# Altium PCB MPU6050.PcbDoc
Units mil, origin at the board's own origin, x right, y up, seen from the top; angles counter-clockwise.
Board outline 770 x 1195 mil, 2 copper layers (Top Layer, Bottom Layer); 15 components, 12 nets, 64 pads, 6 vias.
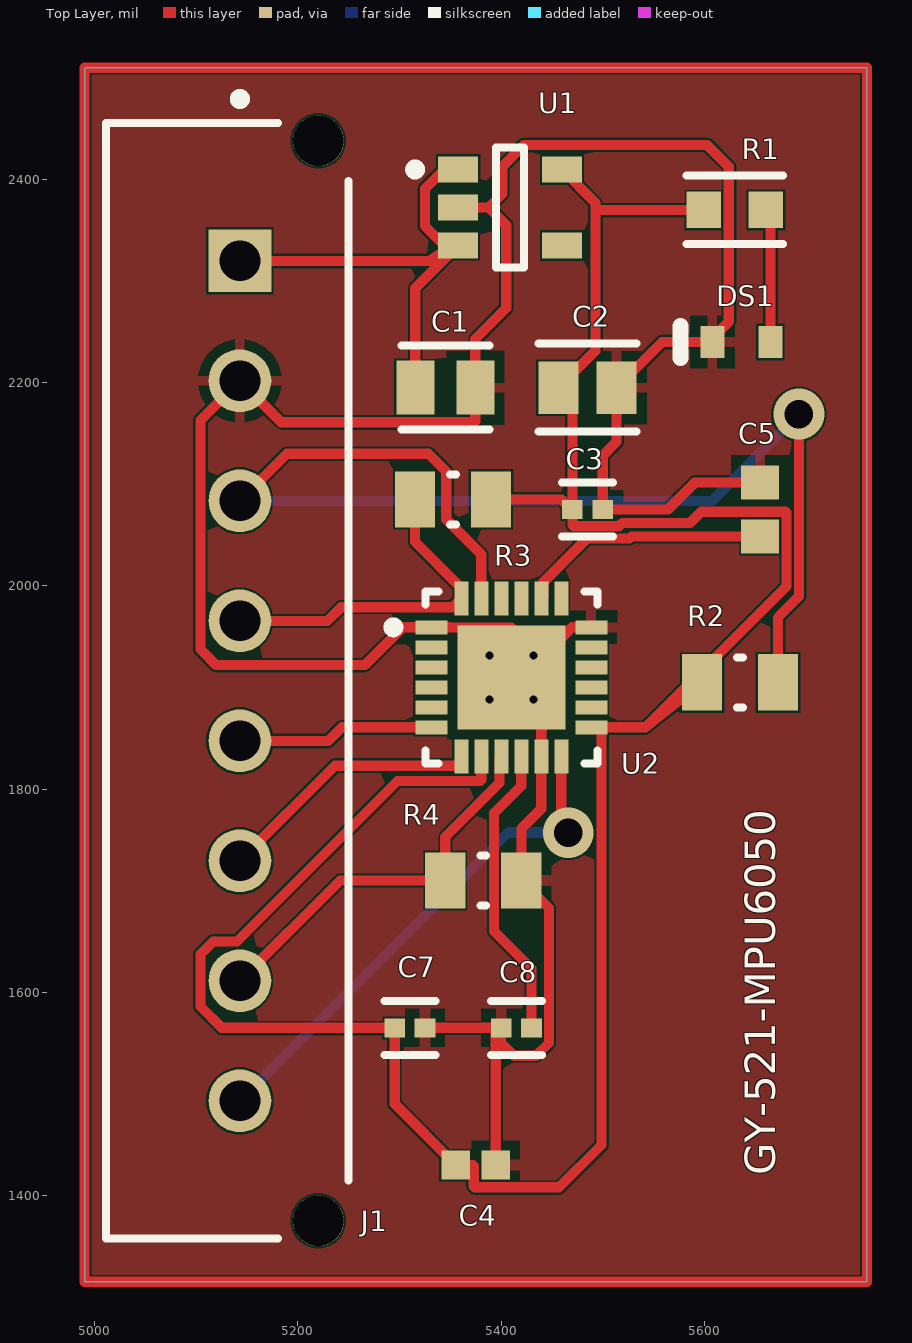
[diagram p0: Top Layer view]
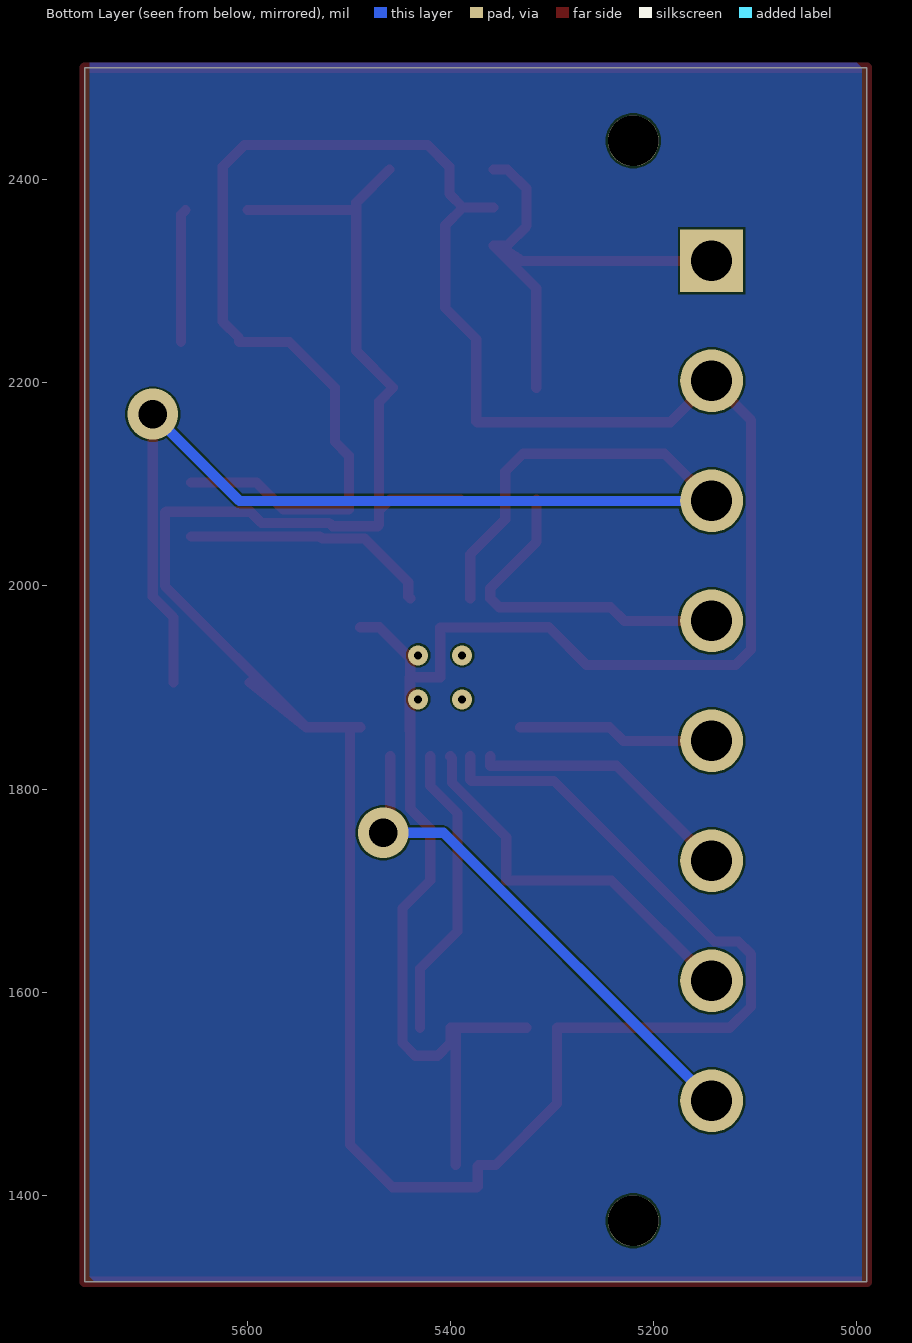
[diagram p1: Bottom Layer view, seen from below]
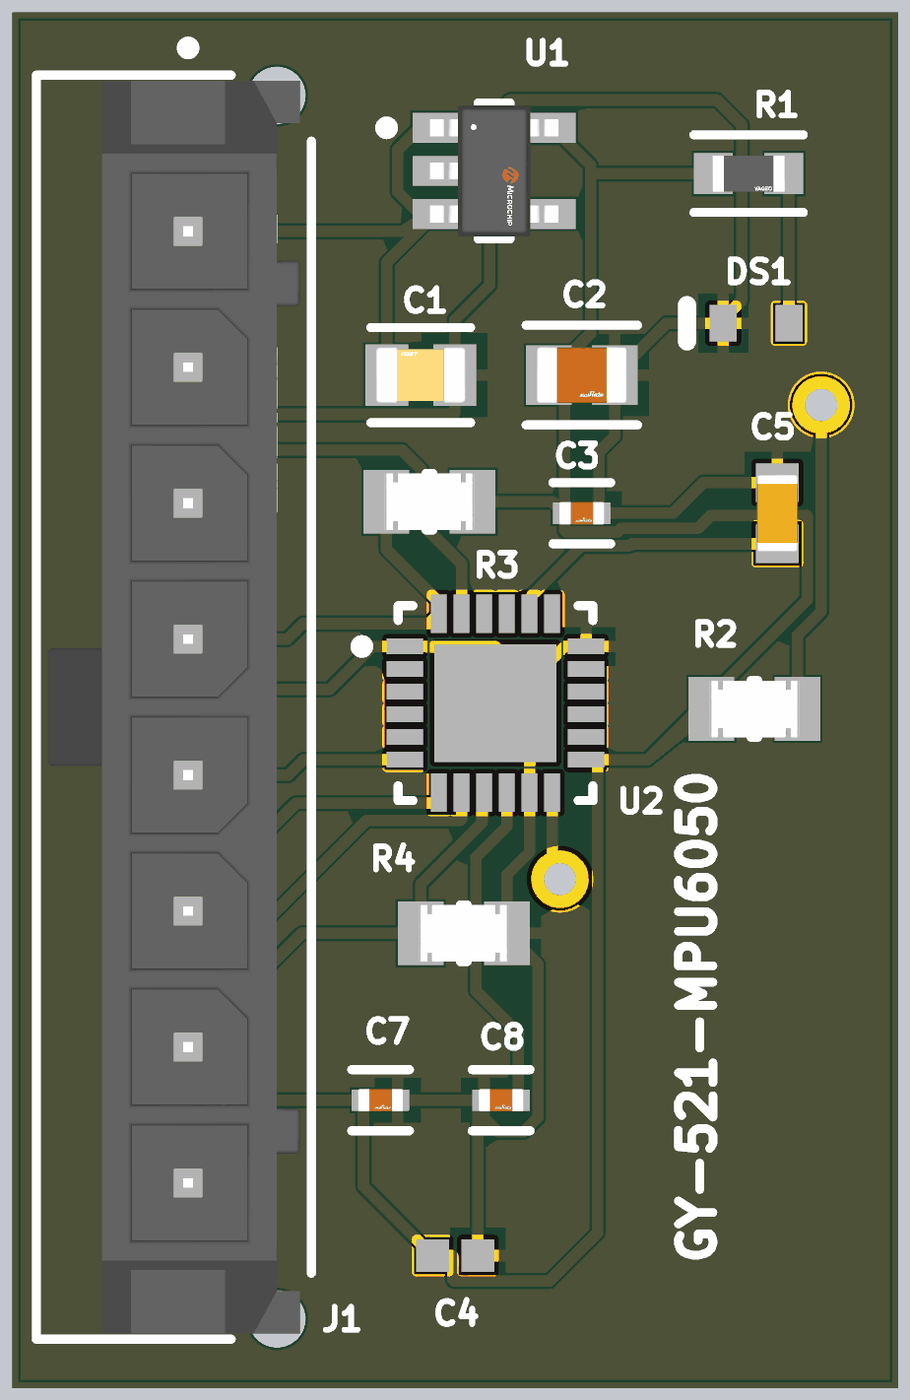
[diagram p2: 3D render of the assembled board from above, using the file's embedded part models]

## Layer stack, top to bottom
Top Solder: solder mask 0.4, Solder Resist, Dk 3.5
Top Layer: signal copper 1.4
Dielectric 1: dielectric 12.6, FR-4, Dk 4.8
Bottom Layer: signal copper 1.4
Bottom Solder: solder mask 0.4, Solder Resist, Dk 3.5

## Board outline
4990,1315 4990,2510 5760,2510 5760,1315

## Design rules (kind name [scope] priority, off if disabled: settings)
Clearance [All] p1: gap=2 ignorepadtopadclearanceinfootprint=TRUE
ComponentClearance [All] p1: gap=5 collisioncheckmode=3 verticalgap=5 showdistances=FALSE
HoleToHoleClearance [All] p1: gap=5 allowstackedmicrovias=TRUE
MinimumSolderMaskSliver [All] p1: minsoldermaskwidth=5
PolygonConnect [All] p1: connectstyle=Relief reliefconductorwidth=10 reliefentries=4 polygonreliefangle="90 Angle" airgapwidth=10
RoutingVias [All] p1: holewidth=28 width=50 viastyle="Through Hole" minholewidth=28 minwidth=50 maxholewidth=28 maxwidth=50
ShortCircuit [All] p1: allowed=TRUE
SilkToSilkClearance [All] p1: silktosilkclearance=5
SilkToSolderMaskClearance [IsPad] p1: minsilkscreentomaskgap=5 clearancetoexposedcopper=TRUE
SolderMaskExpansion [All] p1: expansion=4 istentingtop=FALSE
SupplyNets "Schematic Supply Nets_2" [InNet('GND')] p1: voltage=0.000
SupplyNets "Schematic Supply Nets_1" [InNet('MAX6V')] p2: voltage=0.000
SupplyNets "Schematic Supply Nets" [InNet('+3.3')] p3: voltage=0.000
UnRoutedNet [All] p1: checkbadconnections=TRUE
Width [All] p1: maxlimit=10 minlimit=10 preferedwidth=10
23 further rules are at their usual default settings.

## Components (designator, comment, footprint, x,y, rotation, side; value= is the part's Value field where it differs from the comment)
C1 "4.7" FP-C0805C475K8PACTU-MFG 5345,2195 r0 top
C2 "10" FP-GRM21B-0_15-IPC_C 5485,2195 r0 top
C3 "0.1" FP-GCM155-0_05-IPC_C 5485,2075 r0 top
C4 "10nF" CAPC0402(1005)60_M 5375,1430 r0 top
C5 "2.2nF" CAPC1608X90X35NL10T15 5655,2075 r90 top
C7 "0.1uF" FP-GCM155-0_05-IPC_C 5310.1,1565 r0 top
C8 "0.1uF" FP-GCM155-0_05-IPC_C 5414.9,1565 r0 top
DS1 "red" VISH-TLMX1100_V 5636.46,2240 r180 top
J1 "43650-0815" FP-43650-0815-MFG 5130.43,1906.5 r90 top
R1 "2k" FP-AC0603-IPC_B 5630,2370 r0 top
R2 "4.7k" FP-CRCW0805-e3-IPC_B 5635,1905 r0 top
R3 "4.7k" FP-CRCW0805-e3-IPC_B 5352.57,2085 r180 top
R4 "4.7k" FP-CRCW0805-e3-IPC_B 5382.44,1710 r180 top
U1 "MIC5225-3.3YM5-TR" FP-SOT23-5LD-PL-1-MFG 5408.82,2372.4 r0 top
U2 "MPU-6050" IS-QFN-24_V 5410,1910 r0 top

## Footprints (in the part's own frame and the unit in brackets; to place one, negate y for a bottom-side part, rotate by r counter-clockwise, add the part's x,y. Pads: shape width x height; smd on the part's side, far side on the other; paste and mask are expansions set on the pad)
CAPC0402(1005)60_M [mm] "Chip Capacitor, Body 1.0x0.5mm, Height 0.6mm, IPC Low Density"
  rect 0.72x0.72 smd: 1(-0.5,0) 2(0.5,0)
  body extent -0.55,-0.3 0.55,0.3, height 0.6
CAPC1608X90X35NL10T15 [mm] "Chip Capacitor, 2-Leads, Body 1.7x0.9mm, IPC Medium Density"
  rect 0.85x0.95 smd: 1(-0.675,0) 2(0.675,0)
  body extent -0.85,-0.45 0.85,0.45, height 0.9
FP-43650-0815-MFG [mm]
  rect 1.57x1.57 hole 1.02 paste-2539.97 mask+0: 1(10.5,-0.315)
  round 1.57 hole 1.02 paste-2539.97 mask+0: 2(7.5,-0.315) 3(4.5,-0.315) 4(1.5,-0.315) 5(-1.5,-0.315) 6(-4.5,-0.315) 7(-7.5,-0.315) 8(-10.5,-0.315)
  round 1.27 hole 1.27 unplated paste-2539.97 mask+0: ""(-13.5,-2.275) ""(13.5,-2.275)
  silkscreen extent -13.95,-3.04 14.67,3.04, body extent -14.24,-3.14 14.24,3.14, height 0.25
FP-AC0603-IPC_B [mil]
  rect 33.81x35.91 smd paste+0 mask+0: 1(-30.58,0) 2(30.58,0)
  silkscreen extent -47,-34 47,34, body extent -57,-28 57,28, height 10
FP-C0805C475K8PACTU-MFG [mm]
  rect 0.95x1.35 smd paste+0 mask+0: 1(-0.75,0) 2(0.75,0)
  silkscreen extent -1.1,-1.05 1.1,1.05, body extent -1.4,-0.85 1.4,0.85, height 0.25
FP-CRCW0805-e3-IPC_B [mil]
  rect 39.63x55.44 smd paste+0 mask+0: 1(-37.44,0) 2(37.44,0)
  silkscreen extent -3,-25 3,25, body extent -67,-38 67,38, height 10
FP-GCM155-0_05-IPC_C [mil]
  rect 20.29x18.6 smd paste+0 mask+0: 1(-14.9,0) 2(14.9,0)
  silkscreen extent -25,-27 25,27, body extent -29,-15 29,15, height 10
FP-GRM21B-0_15-IPC_C [mil]
  rect 39.6x51.5 smd paste+0 mask+0: 1(-28.59,0) 2(28.59,0)
  silkscreen extent -48,-43 48,43, body extent -52,-31 52,31, height 10
FP-SOT23-5LD-PL-1-MFG [mm]
  rect 1x0.66 smd paste+0 mask+0: 1(-1.3,0.95) 2(-1.3,0) 3(-1.3,-0.95) 4(1.3,-0.95) 5(1.3,0.95)
  silkscreen extent -2.5,-1.5 0.35,1.5, body extent -1.9,-1.6 1.9,1.6, height 0.25
IS-QFN-24_V [mm] "QFN, 24-Leads, Body 4x4mm, Pitch 0.5mm, Thermal Pad 2.7x2.6mm"
  rect 0.8x0.35 smd: 1(-2,1.25) 2(-2,0.75) 3(-2,0.25) 4(-2,-0.25) 5(-2,-0.75) 6(-2,-1.25) 13(2,-1.25) 14(2,-0.75) 15(2,-0.25) 16(2,0.25) 17(2,0.75) 18(2,1.25)
  rect 0.35x0.85 smd mask+0.102: 7(-1.25,-1.975) 8(-0.75,-1.975) 9(-0.25,-1.975) 10(0.25,-1.975) 11(0.75,-1.975) 12(1.25,-1.975) 19(1.25,1.975) 20(0.75,1.975) 21(0.25,1.975) 22(-0.25,1.975) 23(-0.75,1.975) 24(-1.25,1.975)
  rect 2.7x2.6 smd: 25(0,0)
  silkscreen extent -3.07,-2.15 2.15,2.15, body extent -2,-2 2,2, height 0.95
VISH-TLMX1100_V [mm] "SMD, 2-Leads, Body 1.6x0.8mm"
  rect 0.6x0.8 smd: 1(-0.725,0) 2(0.725,0)
  silkscreen extent 1.53,-0.4 1.53,0.4, body extent -0.8,-0.4 0.8,0.4, height 0.65

## Part data
C1: library part CMP-2007-01007-2, "CAP CER 4.7UF 10V X5R 0805", Capacitance=4.7uF, Case Code (Imperial)=0805, Case Code (Metric)=2012, Dielectric=X5R, Dielectric Material=Ceramic, Max Operating Temperature=85°C, Min Operating Temperature=-55°C, Package Quantity=1, Tolerance=10%, Voltage=10V, Case/Package=0805, Construction=Flat, Depth=1.25mm, Dissipation Factor=5%, Height=1.25mm, Lead Free="Lead Free", Lead Pitch=0.75mm, Length=2mm, Mount="Surface Mount", Number of Pins=2, Packaging="Tape and Reel", Radiation Hardening=No, REACH SVHC="No SVHC", RoHS Compliant=Yes, Series=C, Termination=SMD/SMT, Thickness=0.055inch, Voltage Rating=10V, Voltage Rating (DC)=10V, Width=1.2mm
C2: library part CMP-2007-03541-2, "Chip Multilayer Ceramic Capacitors for General Purpose, 0805, 10uF, X5R, 15%, 10%, 25V", Capacitance=10uF, Case Code (Imperial)=0805, Case Code (Metric)=2012, Dielectric=X5R, Max Operating Temperature=85°C, Min Operating Temperature=-55°C, Package Quantity=1, Tolerance=10%, Voltage=25V, Case/Package=0805, Depth=1.25mm, Height=1.25mm, Lead Free="Lead Free", Length=2mm, Material=Ceramic, Mount="Surface Mount", Packaging="Tape and Reel", Radiation Hardening=No, Termination=SMD/SMT, Thickness=0.053inch, Voltage Rating=25V, Voltage Rating (DC)=25V, Width=0.049inch
C3 C7 C8: library part CMP-2008-03711-3, "Ceramic Capacitor for Automotive 100nF ±10% 16VDC X7R 0402 Paper T/R", Capacitance=100nF, Case Code (Imperial)=0402, Case Code (Metric)=1005, Dielectric=X7R, Max Operating Temperature=125°C, Min Operating Temperature=-55°C, Package Quantity=1, Ratings=AEC-Q200, Tolerance=10%, Voltage=16V, Case/Package=0402, Depth=0.5mm, Height=0.5mm, Lead Free="Lead Free", Length=1mm, Mount="Surface Mount", Packaging="Tape and Reel", Radiation Hardening=No, REACH SVHC="No SVHC", Termination=SMD/SMT, Thickness=0.022inch, Voltage Rating=16V, Voltage Rating (DC)=16V, Width=0.02inch
C4: library part CMP-1034-01878-1, "CAP 10nF 16V -20% to +80% 0402 (1005 Metric) Thickness 0.6mm SMD", Case-EIA=0402, Case-Metric=1005, Rated Voltage="16 V", Tolerance="-20% to +80%", Max Thickness="0.6 mm", Technology=SMT
C5: library part CMP-2006-02908-5, "Chip Capacitor, 2.2 nF, +/- 10%, 50 V, -55 to 125 degC, 0603 (1608 Metric), RoHS, Tape and Reel", Manufacturer=Murata, Max Operating Temperature="125 degC", Min Operating Temperature="-55 degC", Package Quantity=4000, Voltage Rating="50 V", ComponentLink1Description="Manufacturer URL", ComponentLink1URL=http://www.murata.com/, ComponentLink2Description=Datasheet, ComponentLink2URL=http://search.murata.co.jp/Ceramy/image/img/A01X/G101/ENG/GRM188R71H222KA01-01.pdf, DatasheetVersion=02/2016, Height="0.8 mm", Lead Pitch="4 mm", Length="1.6 mm", Mount="Surface Mount", Mounting Technology="Surface Mount", PackageDescription="2-Pin Surface Mount Device, Body 1.6 x 0.8 mm", PackageReference=0603, Packaging="Tape and Reel", Pins=2, REACH SVHC="No SVHC", RoHSCompliant=true
DS1: library part CMP-1666-00027-1, "LED, RED, 2.1 V, -40 to 100 degC, 2-Pin SMD (0603), RoHS, Tape and Reel", Capacitance="12 pF", Case Code (Imperial)=0603, Case Code (Metric)=1608, Max Operating Temperature=125degC, Min Operating Temperature=-55degC, Package Quantity=4000, Resistance="100000000000 Ohm", Tolerance=5%, Type (Capacitors)=C0G, Voltage Rating="50 V", Case/Package=0603, ComponentLink1Description="Manufacturer URL", ComponentLink1URL=http://www.vishay.com/, ComponentLink2Description=Datasheet, ComponentLink2URL=http://www.vishay.com/docs/83173/tlmb1100.pdf, DatasheetVersion="Rev. 2.7, 03/2016", Height="0.8 mm", Length="1.6 mm", Mount="Surface Mount", PackageDescription="2-Pin Surface Mount Device, Body 1.6 x 0.8 mm", PackageReference=TLMX1100, Packaging="Tape and Reel", Pins=2, Radiation Hardening=No, REACH SVHC="No SVHC", RoHSCompliant=True, Voltage Rating (DC)="50 V", Width="0.8 mm"
J1: library part CMP-00257-00277531-1, "43650-0815 Conn Wire to Board HDR 8 POS 3mm Solder ST Top Entry Thru-Hole Micro-Fit 3.0™ Tray", Color=Black, Contact Resistance=30mΩ, Current Rating=5A, Flammability Rating="UL94 V-0", Insulation Resistance=1GΩ, Manufacturer Lifecycle Status=ACTIVE, Max Operating Temperature=105°C, Max Voltage Rating (AC)=250V, Max Voltage Rating (DC)=250.25kV, Min Operating Temperature=-40°C, Voltage Rating=600V, Connector Type="Plug, Socket", Contact Material=Brass, Contact Plating=Tin, Country of Origin=US, Depth=5.57mm, Gender=Male, Glow Wire Compliant=Compliant, Halogen Free="Low Halogen", Housing Color=Black, Housing Material=Thermoplastic, Lead Free="Lead Free", Lead Pitch=3mm, Length=27.65mm, Lifecycle Status=Production, Mount="Through Hole", NexarPartId=277531, Number of Circuits=8, Number of Contacts=8, Number of Ports=1, Number of Positions=8, Number of Rows=1, Number of Terminals=8, Orientation="Vertical, Right Angle", Pitch=3mm, Plating=Tin, Radiation Hardening=No, REACH SVHC=Unknown, RoHS=Compliant, Schedule B=8536694040, Termination="Through Hole", Voltage Rating (DC)=250V
R1: library part CMP-2000-04836-2, "RES 2kΩ 1.00% 0.1W 0603", Case Code (Imperial)=0603, Case Code (Metric)=1608, Max Operating Temperature=155°C, Max Power Dissipation=100mW, Min Operating Temperature=-55°C, Ratings=AEC-Q200, Resistance=2kR, Resistor Type="Thick Film", Temperature Coefficient=100ppm/°C, Tolerance=1%, Voltage Rating=50V, Case/Package=0603, Construction=Rectangular, Depth=0.8mm, Features="Moisture Resistant", Height=0.45mm, Lead Free="Lead Free", Length=1.6mm, Military Standard=Not, Number of Terminations=2, Packaging="Tape and Reel", Power Rating=100mW, Series=AC, Size Code=0603, Termination=SMD/SMT, Width=0.8mm
R2 R3 R4: library part CMP-2100-03615-2, "RES Thick Film, 4.7kΩ, 1%, 0.125W, 100ppm/°C, 0805", Case Code (Imperial)=0805, Case Code (Metric)=2012, Max Operating Temperature=155°C, Max Power Dissipation=125mW, Min Operating Temperature=-55°C, Package Quantity=10, Resistance=4.7kR, Temperature Coefficient=100ppm/°C, Tolerance=1%, Voltage Rating=150V, Case/Package=0805, Composition="Thick Film", Contact Plating=Tin, Depth=1.25mm, Features="Automotive AEC-Q200", Height=0.45mm, Lead Free="Lead Free", Length=2mm, Military Standard=Not, Number of Terminations=2, Packaging="Tape and Reel", Power Rating=125mW, Radiation Hardening=No, Termination=SMD/SMT, Voltage Rating (DC)=150V, Weight=0.000194oz, Width=1.25mm
U1: library part CMP-06324-000013-1, "IC REG LINEAR 3.3V 150MA SOT23-5", Dropout Voltage=310mV, Manufacturer="Microchip Technology", Max Junction Temp=+125°C, Max Supply Voltage=16V, Min Supply Voltage=2.3V, Nominal Supply Current=29-3000uA, Output Current=150mA, Output Voltage=3.3V, Package=SOT23-5LD-PL-1, Temperature="-40°C to +125°C", Temperature Range Low=-40°C, Accuracy Percentage=1%, Automotive=No, Category=IC, ComponentLink2Description=Datasheet, ComponentLink2URL=http://ww1.microchip.com/downloads/en/DeviceDoc/mic5225.pdf, Device Class L1="Integrated Circuits (ICs)", Device Class L2="Power Management ICs", Device Class L3="Voltage Regulators - Linear", Digikey Description="IC REG LINEAR 3.3V 150MA SOT23-5", Height=1.45mm, Lead Free=Yes, Manufacturer Part Number=MIC5225-3.3YM5-TR, Mouser Description="LDO Voltage Regulators High Vin, Low Iq Regulator (Lead Free)", Number of Outputs=1, Octopart=https://octopart.com/mic5225-3.3ym5-tr-microchip-66802280, Output Type=Fixed, RoHS=TRUE, Standoff Height=0mm, Temperature Range High=+125°C
U2: library part CMP-1753-00002-2, "3-Axis Gyroscope, Accelerometer and a Digital Motion Processor(TM) (DMP), 2.375 to 3.46 V, -40 to 85 degC, 24-Pin QFN, RoHS, Tape and Reel", Manufacturer=InvenSense, Standard Package=5,000, Category=Sensors,Transducers, Datasheet URL=http://datasheet.octopart.com/MPU-6050-InvenSense-datasheet-14421344.pdf, Datasheet Version="Rev. 3.3, 05/2012", Dynamic Catalog=MPU-6000™Series, Family=Multifunction, Featured Product=MPU-60506-Axis,IntegratedI²CSolution, Manufacturer URL=http://www.invensense.com/, Online Catalog=MPU-6000™Series, Other Names="1428-1007-2 / MPU6050", Output Type=Digital, Sensor Type=MotionTracking, Unit PriceUSD=Digital

## Via types
v1: diameter 19.68, hole 7.87, Top Layer to Bottom Layer, 4 vias
v2: diameter 50, hole 28, Top Layer to Bottom Layer, 2 vias

## Nets (pads, with @x,y where several pads share a name; then routed paths per layer and width w, separated by ;. In a path a pad name is that pad's centre, name@x,y a point inside that pad or via, vN(x,y) a via of type N, cw(c..) or ccw(c..) an arc to the next point about the centre after c; other vN are vias at no path point)
+3.3: C2.1 C3.1 C4.1 C7.1 R1.1 R2.1 R3.1 U1.5 U2.8 U2.13 | length 2560.5
  Top Layer w10: U2.8 5380.47,1809 5379.47,1808 5298,1808 5140,1650 5116.5,1650 5104,1637.5 5104,1586 5125,1565 C7.1 5295.19,1490.12 C4.1 5372,1430 5373,1429 5373,1409 5374,1408 5457,1408 5498.68,1449.68 U2.13@5498.68,1860.79 ; R3.1 5459.25,2085 5469.25,2075 C3.1 ; U1.5 5492.69,2377.12 5492.69,2370 ; U2.13 U2.13@5498.68,1860.79 ; R2.1 5542,1860.79 ; R1.1 5492.69,2370 ; C3.1 5470.1,2060 5471.4,2058.7 5516,2058.7 5519.3,2062 5586,2062 5597,2073 5680,2073 5681,2072 5681,1999.79 5542,1860.79 ; C3.1 5470.1,2181.31 C2.1 5492.69,2231.28 5492.69,2370 ; U2.13@5498.68,1860.79 5542,1860.79
AD0: J1.7 R4.2 U2.9 | length 388.2
  Top Layer w10: J1.7 5241.61,1710 R4.2 5345,1752.72 5398.27,1805.99 5398.27,1830.35 U2.9
GND: C1.2 C2.2 C3.2 C4.2 C5.2 C7.2 C8.1 DS1.2 J1.2 R4.1 U1.2 U2.1 U2.11 U2.18 U2.25 | length 2864.2
  Top Layer w10: C7.2 C8.1@5399.16,1565 ; U1.2 5387.5,2372.4 ; C4.2 5394.69,1560.53 C8.1@5399.16,1565 ; U2.18 5470,1959.21 5439.53,1928.74 U2.25@5439.53,1910 ; C5.2 5590.57,2101.57 5564,2075 C3.2 5499.9,2128 5513.59,2141.69 C2.2 5558.59,2240 DS1.2 5607.91,2244 5624,2260.09 5624,2412.5 5602.5,2434 5422.5,2434 5401,2412.5 5401,2385.9 5387.5,2372.4 ; 5387.5,2372.4 5405,2354.9 5405,2273.47 5374.53,2243 C1.2 5374.53,2162 5373.53,2161 5183.61,2161 J1.2 5104,2162.94 5104,1937.5 5119.5,1922 5265.79,1922 5303,1959.21 U2.1 5349.79,1959.21 5350,1959 5410,1959 U2.25 U2.25@5439.53,1910 ; C8.1@5399.16,1565 C8.1 5400,1550 5412.5,1537.5 5434.5,1537.5 5447,1550 5447,1682.87 R4.1 5419.87,1761 5439.53,1780.66 U2.11 5439.53,1857 ; 5439.53,1857 U2.25@5439.53,1910 ; 5439.53,1857 5440,1857.47 5440,1910 U2.25@5439.53,1910
  other v1: 5388.35,1888.35 5431.65,1888.35 5388.35,1931.65 5431.65,1931.65
INT: J1.8 U2.12 | length 510.5
  Top Layer w10: U2.12 5459.21,1763.79 v2(5466,1757)
  Bottom Layer w10: J1.8 5406.72,1757 v2(5466,1757)
MAX6V: C1.1 J1.1 U1.1 U1.3 | length 488.3
  Top Layer w10: J1.1 5329.17,2319.88 5347.46,2331.52 U1.3@5343.98,2335 ; C1.1 5315.47,2292.84 U1.3 U1.3@5343.98,2335 ; U1.1 5343.98,2409.8 5324.95,2390.78 5324.95,2354.03 U1.3@5343.98,2335
NetC5_1: C5.1 U2.20 | length 248.7
  Top Layer w10: U2.20 5441.42,1989.65 5441.42,2003.48 5484.63,2046.7 5526.48,2046.7 5528.21,2048.43 C5.1
NetC8_2: C8.2 U2.10 | length 293.6
  Top Layer w10: U2.10 5419.84,1803 5393,1776.16 5393,1660 5429.81,1623.19 C8.2
NetDS1_1: DS1.1 R1.2 | length 131.8
  Top Layer w10: R1.2 5665,2365.58 DS1.1
SCL: J1.3 R2.2 U2.23 | length 1226.7
  Top Layer w10: J1.3 5189.17,2130 5328.5,2130 5346,2112.5 5346,2065.47 5380.47,2031 U2.23 ; R2.2 5672.44,1969 5693,1989.56 v2(5693,2169)
  Bottom Layer w10: J1.3 5607.66,2083.66 v2(5693,2169)
SDA: J1.4 R3.2 U2.24 | length 343.3
  Top Layer w10: J1.4 5229,1965.55 5242.45,1979 5352.03,1979 U2.24 5360.79,1997.6 5315.13,2043.26 R3.2
XCL: J1.6 U2.7 | length 266
  Top Layer w10: J1.6 5236.5,1823 5360.79,1823 U2.7
XDA: J1.5 U2.6 | length 194
  Top Layer w10: J1.5 5230,1847.44 5243.35,1860.79 U2.6
pads on no net: J1. U1.4 U2.2 U2.3 U2.4 U2.5 U2.14 U2.15 U2.16 U2.17 U2.19 U2.21 U2.22
copper on no net: | length 3930
  Top Layer w10: 4990,1315 5760,1315 5760,2510 4990,2510 4990,1315

## Polygon pours and split planes (outlines as drawn)
GND on Top Layer "GND_L01_P000" (solid, pour order 0): 4990,2510 5760,2510 5760,1315 4990,1315
no net on Bottom Layer "NONET_L02_P001" (solid, pour order 1): 4995,2510 5000,2515 5755,2515 5755,1320 5750,1315 4995,1315

## Silkscreen, mask and mechanical layers (free items; w line width, h text height)
Top Overlay:
  text "GY-521-MPU6050" at 5670,1420 h30 r90